# Altium PCB Route_Guide_and_Tuning.PcbDoc (part 3 of 8)
Units mil, origin at the board's own origin, x right, y up, seen from the top; angles counter-clockwise.
Board outline 3600 x 2300 mil, 14 copper layers (L1 TOP, L2_G, L3 SIG, L4_G, L4 SIG, L6_P, L7_G, L10_P, L11_P, L7 SIG, L13_P, L8 SIG, L15_G, L10 BOT), stack 89.291 mil thick; 4 components, 1934 nets, 2174 pads, 2165 vias.
Unrouted connection lines stored in the file: 123.
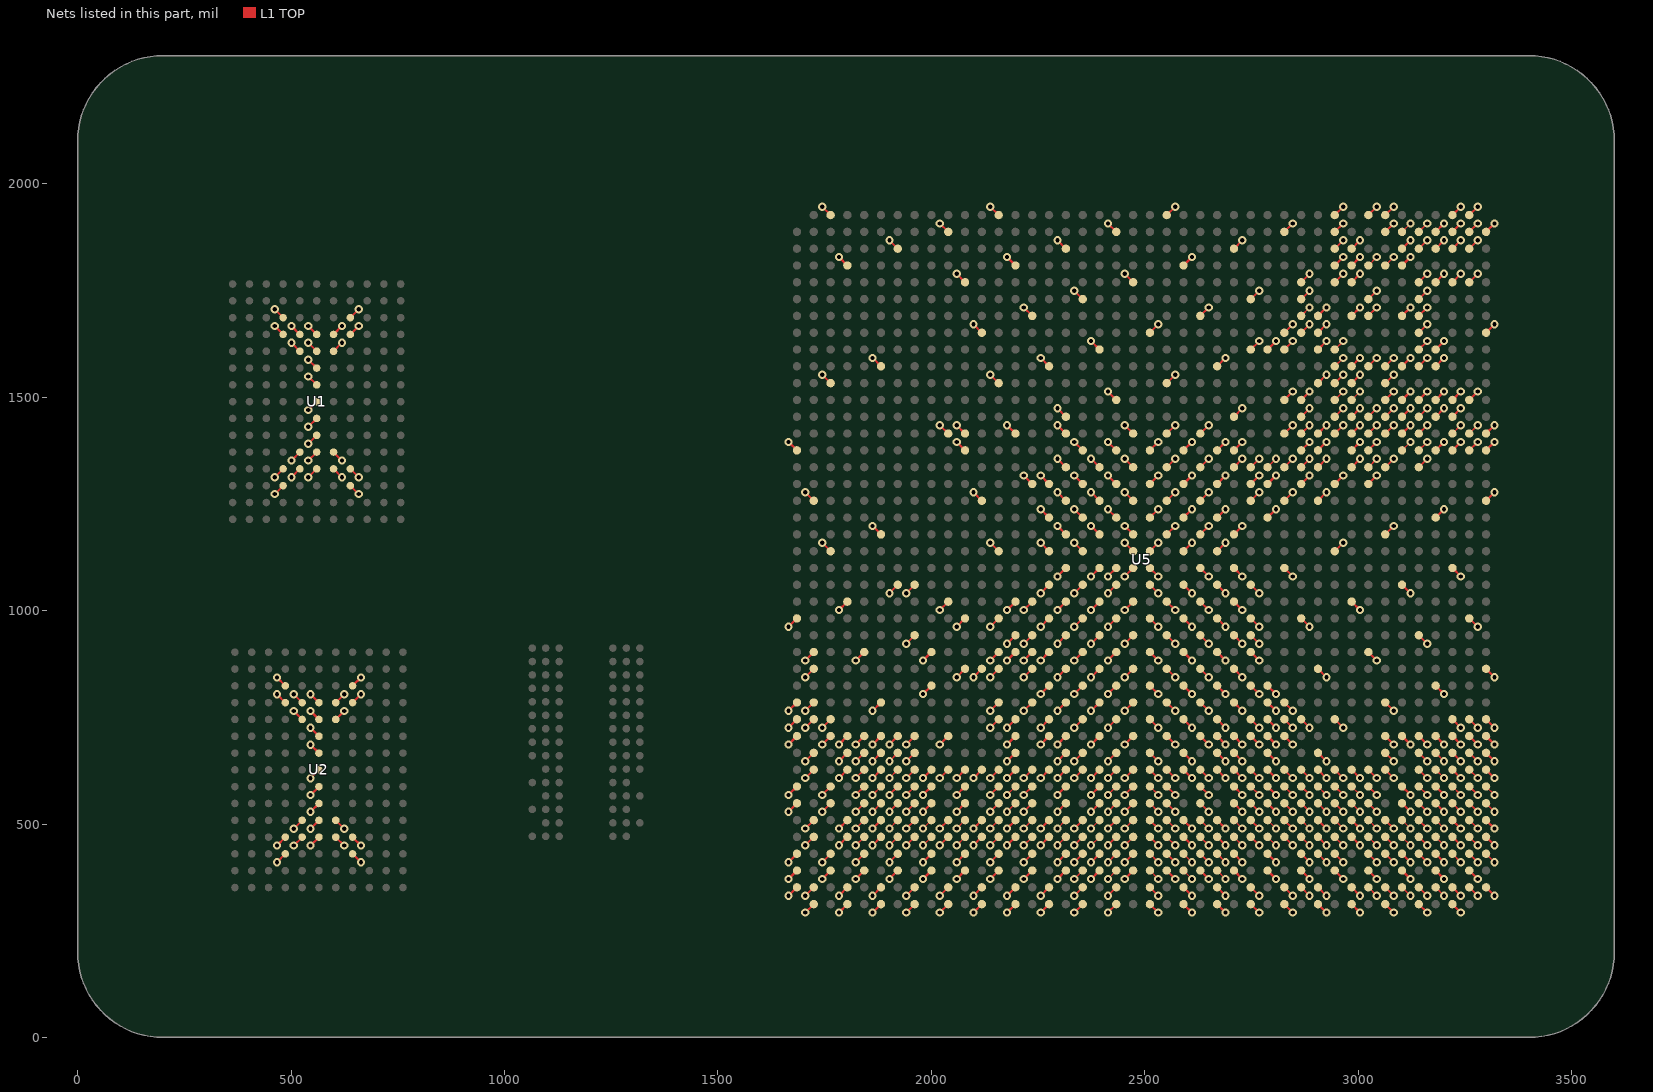
[diagram p15: the nets of this part, all layers, seen from the top]

## Via types
v1: diameter 19.4, hole 10, L1 TOP to L10 BOT, 2087 vias
v2: diameter 18.6, hole 10, L1 TOP to L10 BOT, tented both sides, 78 vias

## Nets (pads, with @x,y where several pads share a name; then routed paths per layer and width w, separated by ;. In a path a pad name is that pad's centre, name@x,y a point inside that pad or via, vN(x,y) a via of type N, cw(c..) or ccw(c..) an arc to the next point about the centre after c; other vN are vias at no path point) (continued)
DDR3.CKE0: U5.AV34 | length 27.8
  L1 TOP w5: U5.AV34@3141.85,1611.5 v1(3161.54,1631.18)
DDR3.CKE1: U5.AV35 | length 27.8
  L1 TOP w5: U5.AV35@3141.85,1650.87 v1(3161.54,1670.55)
DDR3.DM0: 
DDR3.DM1: 
DDR3.DM2: 
DDR3.DM3: 
DDR3.DM4: 
DDR3.DM5: 
DDR3.DM6: 
DDR3.DM7: 
DDR3.DM8: 
DDR3.DQ0: U5.AH25 | length 27.8
  L1 TOP w5: U5.AH25@2748.15,1257.17 v1(2767.84,1276.85)
DDR3.DQ1: U5.AM29 | length 27.8
  L1 TOP w5: U5.AM29@2905.63,1414.65 v1(2925.32,1434.33)
DDR3.DQ2: U5.AM28 | length 27.8
  L1 TOP w5: U5.AM28@2905.63,1375.28 v1(2925.32,1394.96)
DDR3.DQ3: U5.AN29 | length 27.8
  L1 TOP w5: U5.AN29@2945,1414.65 v1(2964.69,1434.33)
DDR3.DQ4: U5.AG27 | length 27.8
  L1 TOP w5: U5.AG27@2708.78,1335.91 v1(2728.47,1355.59)
DDR3.DQ5: U5.AH26 | length 27.8
  L1 TOP w5: U5.AH26@2748.15,1296.54 v1(2767.84,1316.22)
DDR3.DQ6: U5.AL27 | length 27.8
  L1 TOP w5: U5.AL27@2866.26,1335.91 v1(2885.95,1355.59)
DDR3.DQ7: U5.AK25 | length 27.8
  L1 TOP w5: U5.AK25@2826.89,1257.17 v1(2846.58,1276.85)
DDR3.DQ8: U5.AP28 | length 27.8
  L1 TOP w5: U5.AP28@2984.37,1375.28 v1(3004.06,1394.96)
DDR3.DQ9: U5.AY30 | length 27.8
  L1 TOP w5: U5.AY30@3220.59,1454.02 v1(3240.28,1473.7)
DDR3.DQ10: U5.AR29 | length 27.8
  L1 TOP w5: U5.AR29@3023.74,1414.65 v1(3043.43,1434.33)
DDR3.DQ11: U5.AR30 | length 27.8
  L1 TOP w5: U5.AR30@3023.74,1454.02 v1(3043.43,1473.7)
DDR3.DQ12: U5.AM27 | length 27.8
  L1 TOP w5: U5.AM27@2905.63,1335.91 v1(2925.32,1355.59)
DDR3.DQ13: U5.AN26 | length 27.8
  L1 TOP w5: U5.AN26@2945,1296.54 v1(2964.69,1316.22)
DDR3.DQ14: U5.AW28 | length 27.8
  L1 TOP w5: U5.AW28@3181.22,1375.28 v1(3200.91,1394.96)
DDR3.DQ15: U5.AV29 | length 27.8
  L1 TOP w5: U5.AV29@3141.85,1414.65 v1(3161.54,1434.33)
DDR3.DQ16: U5.AY28 | length 27.8
  L1 TOP w5: U5.AY28@3220.59,1375.28 v1(3240.28,1394.96)
DDR3.DQ17: U5.AU29 | length 27.8
  L1 TOP w5: U5.AU29@3102.48,1414.65 v1(3122.17,1434.33)
DDR3.DQ18: U5.AW31 | length 27.8
  L1 TOP w5: U5.AW31@3181.22,1493.39 v1(3200.91,1513.07)
DDR3.DQ19: U5.AU31 | length 27.8
  L1 TOP w5: U5.AU31@3102.48,1493.39 v1(3122.17,1513.07)
DDR3.DQ20: U5.AL26 | length 27.8
  L1 TOP w5: U5.AL26@2866.26,1296.54 v1(2885.95,1316.22)
DDR3.DQ21: U5.BB28 | length 27.8
  L1 TOP w5: U5.BB28@3299.33,1375.28 v1(3319.02,1394.96)
DDR3.DQ22: U5.AV30 | length 27.8
  L1 TOP w5: U5.AV30@3141.85,1454.02 v1(3161.54,1473.7)
DDR3.DQ23: U5.AT30 | length 27.8
  L1 TOP w5: U5.AT30@3063.11,1454.02 v1(3082.8,1473.7)
DDR3.DQ24: U5.AT29 | length 27.8
  L1 TOP w5: U5.AT29@3063.11,1414.65 v1(3082.8,1434.33)
DDR3.DQ25: U5.AW30 | length 27.8
  L1 TOP w5: U5.AW30@3181.22,1454.02 v1(3200.91,1473.7)
DDR3.DQ26: U5.BA31 | length 27.8
  L1 TOP w5: U5.BA31@3259.96,1493.39 v1(3279.65,1513.07)
DDR3.DQ27: U5.AV31 | length 27.8
  L1 TOP w5: U5.AV31@3141.85,1493.39 v1(3161.54,1513.07)
DDR3.DQ28: U5.AP27 | length 27.8
  L1 TOP w5: U5.AP27@2984.37,1335.91 v1(3004.06,1355.59)
DDR3.DQ29: U5.AR28 | length 27.8
  L1 TOP w5: U5.AR28@3023.74,1375.28 v1(3043.43,1394.96)
DDR3.DQ30: U5.BB29 | length 27.8
  L1 TOP w5: U5.BB29@3299.33,1414.65 v1(3319.02,1434.33)
DDR3.DQ31: U5.AT31 | length 27.8
  L1 TOP w5: U5.AT31@3063.11,1493.39 v1(3082.8,1513.07)
DDR3.DQ32: U5.AU33 | length 27.8
  L1 TOP w5: U5.AU33@3102.48,1572.13 v1(3122.17,1591.81)
DDR3.DQ33: U5.AV33 | length 27.8
  L1 TOP w5: U5.AV33@3141.85,1572.13 v1(3161.54,1591.81)
DDR3.DQ34: U5.AP33 | length 27.8
  L1 TOP w5: U5.AP33@2984.37,1572.13 v1(3004.06,1591.81)
DDR3.DQ35: U5.AM32 | length 27.8
  L1 TOP w5: U5.AM32@2905.63,1532.76 v1(2925.32,1552.44)
DDR3.DQ36: U5.AT32 | length 27.8
  L1 TOP w5: U5.AT32@3063.11,1532.76 v1(3082.8,1552.44)
DDR3.DQ37: U5.AW33 | length 27.8
  L1 TOP w5: U5.AW33@3181.22,1572.13 v1(3200.91,1591.81)
DDR3.DQ38: U5.AR33 | length 27.8
  L1 TOP w5: U5.AR33@3023.74,1572.13 v1(3043.43,1591.81)
DDR3.DQ39: U5.AP32 | length 27.8
  L1 TOP w5: U5.AP32@2984.37,1532.76 v1(3004.06,1552.44)
DDR3.DQ40: U5.BA40 | length 27.8
  L1 TOP w5: U5.BA40@3259.96,1847.72 v1(3279.65,1867.4)
DDR3.DQ41: U5.BA41 | length 27.8
  L1 TOP w5: U5.BA41@3259.96,1887.09 v1(3279.65,1906.77)
DDR3.DQ42: U5.AK34 | length 27.8
  L1 TOP w5: U5.AK34@2826.89,1611.5 v1(2846.58,1631.18)
DDR3.DQ43: U5.AP38 | length 27.8
  L1 TOP w5: U5.AP38@2984.37,1768.98 v1(3004.06,1788.66)
DDR3.DQ44: U5.AM34 | length 27.8
  L1 TOP w5: U5.AM34@2905.63,1611.5 v1(2925.32,1631.18)
DDR3.DQ45: U5.AL35 | length 27.8
  L1 TOP w5: U5.AL35@2866.26,1650.87 v1(2885.95,1670.55)
DDR3.DQ46: U5.AM36 | length 27.8
  L1 TOP w5: U5.AM36@2905.63,1690.24 v1(2925.32,1709.92)
DDR3.DQ47: U5.AY40 | length 27.8
  L1 TOP w5: U5.AY40@3220.59,1847.72 v1(3240.28,1867.4)
DDR3.DQ48: U5.BA42 | length 27.8
  L1 TOP w5: U5.BA42@3259.96,1926.46 v1(3279.65,1946.14)
DDR3.DQ49: U5.AW41 | length 27.8
  L1 TOP w5: U5.AW41@3181.22,1887.09 v1(3200.91,1906.77)
DDR3.DQ50: U5.AU39 | length 27.8
  L1 TOP w5: U5.AU39@3102.48,1808.35 v1(3122.17,1828.03)
DDR3.DQ51: U5.AL37 | length 27.8
  L1 TOP w5: U5.AL37@2866.26,1729.61 v1(2885.95,1749.29)
DDR3.DQ52: U5.AW40 | length 27.8
  L1 TOP w5: U5.AW40@3181.22,1847.72 v1(3200.91,1867.4)
DDR3.DQ53: U5.AV40 | length 27.8
  L1 TOP w5: U5.AV40@3141.85,1847.72 v1(3161.54,1867.4)
DDR3.DQ54: U5.BB41 | length 27.8
  L1 TOP w5: U5.BB41@3299.33,1887.09 v1(3319.02,1906.77)
DDR3.DQ55: U5.AN38 | length 27.8
  L1 TOP w5: U5.AN38@2945,1768.98 v1(2964.69,1788.66)
DDR3.DQ56: U5.AY42 | length 27.8
  L1 TOP w5: U5.AY42@3220.59,1926.46 v1(3240.28,1946.14)
DDR3.DQ57: U5.AP40 | length 27.8
  L1 TOP w5: U5.AP40@2984.37,1847.72 v1(3004.06,1867.4)
DDR3.DQ58: U5.AR42 | length 27.8
  L1 TOP w5: U5.AR42@3023.74,1926.46 v1(3043.43,1946.14)
DDR3.DQ59: U5.AN41 | length 27.8
  L1 TOP w5: U5.AN41@2945,1887.09 v1(2964.69,1906.77)
DDR3.DQ60: U5.AN40 | length 27.8
  L1 TOP w5: U5.AN40@2945,1847.72 v1(2964.69,1867.4)
DDR3.DQ61: U5.AN39 | length 27.8
  L1 TOP w5: U5.AN39@2945,1808.35 v1(2964.69,1828.03)
DDR3.DQ62: U5.AT41 | length 27.8
  L1 TOP w5: U5.AT41@3063.11,1887.09 v1(3082.8,1906.77)
DDR3.DQ63: U5.AT42 | length 27.8
  L1 TOP w5: U5.AT42@3063.11,1926.46 v1(3082.8,1946.14)
DDR3.DQ64: U5.AL29 | length 27.8
  L1 TOP w5: U5.AL29@2866.26,1414.65 v1(2885.95,1434.33)
DDR3.DQ65: U5.AN30 | length 27.8
  L1 TOP w5: U5.AN30@2945,1454.02 v1(2964.69,1473.7)
DDR3.DQ66: U5.AL31 | length 27.8
  L1 TOP w5: U5.AL31@2866.26,1493.39 v1(2885.95,1513.07)
DDR3.DQ67: U5.AG28 | length 27.8
  L1 TOP w5: U5.AG28@2708.78,1375.28 v1(2728.47,1394.96)
DDR3.DQ68: U5.AJ26 | length 27.8
  L1 TOP w5: U5.AJ26@2787.52,1296.54 v1(2807.21,1316.22)
DDR3.DQ69: U5.AK29 | length 27.8
  L1 TOP w5: U5.AK29@2826.89,1414.65 v1(2846.58,1434.33)
DDR3.DQ70: U5.AL30 | length 27.8
  L1 TOP w5: U5.AL30@2866.26,1454.02 v1(2885.95,1473.7)
DDR3.DQ71: U5.AP30 | length 27.8
  L1 TOP w5: U5.AP30@2984.37,1454.02 v1(3004.06,1473.7)
DDR3.DQS_N0: U5.AJ27 | length 27.8
  L1 TOP w3.8: U5.AJ27@2787.52,1335.91 v1(2807.21,1355.59)
DDR3.DQS_N1: U5.AV28 | length 27.8
  L1 TOP w3.8: U5.AV28@3141.85,1375.28 v1(3161.54,1394.96)
DDR3.DQS_N2: U5.AT27 | length 27.8
  L1 TOP w3.8: U5.AT27@3063.11,1335.91 v1(3082.8,1355.59)
DDR3.DQS_N3: U5.BA29 | length 27.8
  L1 TOP w3.8: U5.BA29@3259.96,1414.65 v1(3279.65,1434.33)
DDR3.DQS_N4: U5.AN34 | length 27.8
  L1 TOP w3.8: U5.AN34@2945,1611.5 v1(2964.69,1631.18)
DDR3.DQS_N5: U5.AL36 | length 27.8
  L1 TOP w3.8: U5.AL36@2866.26,1690.24 v1(2885.95,1709.92)
DDR3.DQS_N6: U5.AT39 | length 27.8
  L1 TOP w3.8: U5.AT39@3063.11,1808.35 v1(3082.8,1828.03)
DDR3.DQS_N7: U5.AU41 | length 27.8
  L1 TOP w3.8: U5.AU41@3102.48,1887.09 v1(3122.17,1906.77)
DDR3.DQS_N8: U5.AN31 | length 27.8
  L1 TOP w3.8: U5.AN31@2945,1493.39 v1(2964.69,1513.07)
DDR3.DQS_P0: U5.AK27 | length 27.8
  L1 TOP w3.8: U5.AK27@2826.89,1335.91 v1(2846.58,1355.59)
DDR3.DQS_P1: U5.AU28 | length 27.8
  L1 TOP w3.8: U5.AU28@3102.48,1375.28 v1(3122.17,1394.96)
DDR3.DQS_P2: U5.AR27 | length 27.8
  L1 TOP w3.8: U5.AR27@3023.74,1335.91 v1(3043.43,1355.59)
DDR3.DQS_P3: U5.AY29 | length 27.8
  L1 TOP w3.8: U5.AY29@3220.59,1414.65 v1(3240.28,1434.33)
DDR3.DQS_P4: U5.AN33 | length 27.8
  L1 TOP w3.8: U5.AN33@2945,1572.13 v1(2964.69,1591.81)
DDR3.DQS_P5: U5.AK35 | length 27.8
  L1 TOP w3.8: U5.AK35@2826.89,1650.87 v1(2846.58,1670.55)
DDR3.DQS_P6: U5.AR39 | length 27.8
  L1 TOP w3.8: U5.AR39@3023.74,1808.35 v1(3043.43,1828.03)
DDR3.DQS_P7: U5.AV41 | length 27.8
  L1 TOP w3.8: U5.AV41@3141.85,1887.09 v1(3161.54,1906.77)
DDR3.DQS_P8: U5.AP31 | length 27.8
  L1 TOP w3.8: U5.AP31@2984.37,1493.39 v1(3004.06,1513.07)
DDR3.ODT0: U5.AU36 | length 27.8
  L1 TOP w5: U5.AU36@3102.48,1690.24 v1(3122.17,1709.92)
DDR3.ODT1: U5.AV36 | length 27.8
  L1 TOP w5: U5.AV36@3141.85,1690.24 v1(3161.54,1709.92)
DDR3.RASN: U5.AY38 | length 27.8
  L1 TOP w5: U5.AY38@3220.59,1768.98 v1(3240.28,1788.66)
DDR3.RESETN: U5.N13 | length 27.8
  L1 TOP w5: v1(2137.91,765.04) U5.N13@2157.6,784.72
DDR3.SN0: U5.AW38 | length 27.8
  L1 TOP w5: U5.AW38@3181.22,1768.98 v1(3200.91,1788.66)
DDR3.SN1: U5.AR37 | length 27.8
  L1 TOP w5: U5.AR37@3023.74,1729.61 v1(3043.43,1749.29)
DDR3.SN2: U5.AP36 | length 27.8
  L1 TOP w5: U5.AP36@2984.37,1690.24 v1(3004.06,1709.92)
DDR3.SN3: U5.AH34 | length 27.8
  L1 TOP w5: U5.AH34@2748.15,1611.5 v1(2767.84,1631.18)
DDR3.WEN: U5.AV38 | length 27.8
  L1 TOP w5: U5.AV38@3141.85,1768.98 v1(3161.54,1788.66)
DDR3_VREF: 
DDR3_VTT: 
DONE_LEDN: 
EPB.DOEN: 
EPB.PADDR5: 
EPB.PADDR6: 
EPB.PADDR7: 
EPB.PADDR8: 
EPB.PADDR9: 
EPB.PADDR10: 
EPB.PADDR11: 
EPB.PADDR12: 
EPB.PADDR13: 
EPB.PADDR14: 
EPB.PADDR15: 
EPB.PADDR16: 
EPB.PADDR17: 
EPB.PADDR18: 
EPB.PADDR19: 
EPB.PADDR20: 
EPB.PADDR21: 
EPB.PADDR22: 
EPB.PADDR23: 
EPB.PADDR24: 
EPB.PADDR25: 
EPB.PADDR26: 
EPB.PADDR27: 
EPB.PADDR28: 
EPB.PADDR29: 
EPB.PADDR30: 
EPB.PADDR31: 
EPB.PBEN0: 
EPB.PBEN1: 
EPB.PBEN2: 
EPB.PBEN3: 
EPB.PBLASTN: 
EPB.PCSN_CPLD: 
EPB.PCSN_FLASH: 
EPB.PCSN_FPGA0: 
EPB.PCSN_FPGA1: 
EPB.PCSN_SMAP: 
EPB.PDATA0: 
EPB.PDATA1: 
EPB.PDATA2: 
EPB.PDATA3: 
EPB.PDATA4: 
EPB.PDATA5: 
EPB.PDATA6: 
EPB.PDATA7: 
EPB.PDATA8: 
EPB.PDATA9: 
EPB.PDATA10: 
EPB.PDATA11: 
EPB.PDATA12: 
EPB.PDATA13: 
EPB.PDATA14: 
EPB.PDATA15: 
EPB.PDATA16: 
EPB.PDATA17: 
EPB.PDATA18: 
EPB.PDATA19: 
EPB.PDATA20: 
EPB.PDATA21: 
EPB.PDATA22: 
EPB.PDATA23: 
EPB.PDATA24: 
EPB.PDATA25: 
EPB.PDATA26: 
EPB.PDATA27: 
EPB.PDATA28: 
EPB.PDATA29: 
EPB.PDATA30: 
EPB.PDATA31: 
EPB.PERCLK: 
EPB.POEN: 
EPB.PRDY: 
EPB.PWRN: 
EXT_REFCLK_N0: U5.G9 | length 27.8
  L1 TOP w3.8: v1(1901.69,607.56) U5.G9@1921.38,627.24
EXT_REFCLK_N1: U5.AB7 | length 27.8
  L1 TOP w3.8: U5.AB7@2511.93,548.5 v1(2531.62,528.82)
EXT_REFCLK_N2: U5.AK7 | length 27.8
  L1 TOP w3.8: U5.AK7@2826.89,548.5 v1(2846.58,528.82)
EXT_REFCLK_N3: U5.BA9 | length 27.8
  L1 TOP w3.8: U5.BA9@3259.96,627.24 v1(3279.65,607.56)
EXT_REFCLK_N4: U5.E9 | length 27.8
  L1 TOP w3.8: v1(1822.95,607.56) U5.E9@1842.64,627.24
EXT_REFCLK_N5: U5.Y7 | length 27.8
  L1 TOP w3.8: v1(2413.5,528.82) U5.Y7@2433.19,548.5
EXT_REFCLK_N6: U5.AH7 | length 27.8
  L1 TOP w3.8: U5.AH7@2748.15,548.5 v1(2767.84,528.82)
EXT_REFCLK_N7: U5.AW9 | length 27.8
  L1 TOP w3.8: U5.AW9@3181.22,627.24 v1(3200.91,607.56)
EXT_REFCLK_P0: U5.G10 | length 27.8
  L1 TOP w3.8: v1(1901.69,646.93) U5.G10@1921.38,666.61
EXT_REFCLK_P1: U5.AB8 | length 27.8
  L1 TOP w3.8: U5.AB8@2511.93,587.87 v1(2531.62,568.19)
EXT_REFCLK_P2: U5.AK8 | length 27.8
  L1 TOP w3.8: U5.AK8@2826.89,587.87 v1(2846.58,568.19)
EXT_REFCLK_P3: U5.BA10 | length 27.8
  L1 TOP w3.8: U5.BA10@3259.96,666.61 v1(3279.65,646.93)
EXT_REFCLK_P4: U5.E10 | length 27.8
  L1 TOP w3.8: v1(1822.95,646.93) U5.E10@1842.64,666.61
EXT_REFCLK_P5: U5.Y8 | length 27.8
  L1 TOP w3.8: v1(2413.5,568.19) U5.Y8@2433.19,587.87
EXT_REFCLK_P6: U5.AH8 | length 27.8
  L1 TOP w3.8: U5.AH8@2748.15,587.87 v1(2767.84,568.19)
EXT_REFCLK_P7: U5.AW10 | length 27.8
  L1 TOP w3.8: U5.AW10@3181.22,666.61 v1(3200.91,646.93)
FAN_ALERTN: 
FAULT_LEDN: 
FAULTN: 
FLASH_BUSYN: 
FTDI_CTRL0: 
FTDI_CTRL1: 
FTDI_CTRL2: 
FTDI_CTRL3: 
FTDI_TCK: 
FTDI_TDI: 
FTDI_TDO: 
FTDI_TMS: 
FTDI_TRSTN: 
FTDI_USBD_N: 
FTDI_USBD_P: 
GETH_IRQN: 
GND: U1.C4 U1.C8 U1.D4 U1.D5 U1.D6 U1.D7 U1.D8 U1.E5 U1.E6 U1.E7 U1.F6 U1.G6 U1.H6 U1.J6 U1.K6 U1.L5 U1.L6 U1.L7 U1.M4 U1.M5 U1.M6 U1.M7 U1.M8 U1.N4 U1.N8 U2.C4 U2.C8 U2.D4 U2.D5 U2.D6 U2.D7 U2.D8 U2.E5 U2.E6 U2.E7 U2.F6 U2.G6 U2.H6 U2.J6 U2.K6 U2.L5 U2.L6 U2.L7 U2.M4 U2.M5 U2.M6 U2.M7 U2.M8 U2.N4 U2.N8 U5.A2 U5.A3 U5.A4 U5.A7 U5.A8 U5.A11 U5.A13 U5.A18 U5.A28 U5.AA3 U5.AA7 U5.AA9 U5.AA11 U5.AA13 U5.AA15 U5.AA17 U5.AA19 U5.AA21 U5.AA22 U5.AA23 U5.AA25 U5.AA27 U5.AA29 U5.AA38 U5.AB1 U5.AB2 U5.AB5 U5.AB6 U5.AB9 U5.AB10 U5.AB12 U5.AB14 U5.AB16 U5.AB18 U5.AB20 U5.AB21 U5.AB22 U5.AB24 U5.AB26 U5.AB28 U5.AB35 U5.AC3 U5.AC7 U5.AC9 U5.AC11 U5.AC13 U5.AC15 U5.AC17 U5.AC19 U5.AC23 U5.AC25 U5.AC27 U5.AC29 U5.AC32 U5.AC42 U5.AD1 U5.AD2 U5.AD5 U5.AD6 U5.AD9 U5.AD10 U5.AD12 U5.AD14 U5.AD16 U5.AD18 U5.AD20 U5.AD22 U5.AD24 U5.AD26 U5.AD28 U5.AD39 U5.AE3 U5.AE7 U5.AE9 U5.AE11 U5.AE13 U5.AE15 U5.AE17 U5.AE19 U5.AE21 U5.AE23 U5.AE25 U5.AE27 U5.AE29 U5.AE36 U5.AF1 U5.AF2 U5.AF5 U5.AF6 U5.AF9 U5.AF10 U5.AF11 U5.AF12 U5.AF14 U5.AF16 U5.AF18 U5.AF20 U5.AF22 U5.AF24 U5.AF26 U5.AF28 U5.AF33 U5.AG3 U5.AG4 U5.AG7 U5.AG8 U5.AG9 U5.AG10 U5.AG11 U5.AG13 U5.AG15 U5.AG17 U5.AG19 U5.AG21 U5.AG23 U5.AG30 U5.AG40 U5.AH1 U5.AH2 U5.AH5 U5.AH6 U5.AH9 U5.AH11 U5.AH12 U5.AH14 U5.AH16 U5.AH17 U5.AH18 U5.AH20 U5.AH27 U5.AH37 U5.AJ3 U5.AJ7 U5.AJ9 U5.AJ10 U5.AJ11 U5.AJ12 U5.AJ13 U5.AJ14 U5.AJ24 U5.AJ34 U5.AK1 U5.AK2 U5.AK5 U5.AK6 U5.AK9 U5.AK11 U5.AK12 U5.AK13 U5.AK21 U5.AK31 U5.AK41 U5.AL3 U5.AL7 U5.AL9 U5.AL12 U5.AL18 U5.AL28 U5.AL38 U5.AM1 U5.AM2 U5.AM5 U5.AM9 U5.AM10 U5.AM15 U5.AM25 U5.AM35 U5.AN3 U5.AN7 U5.AN9 U5.AN12 U5.AN22 U5.AN32 U5.AN42 U5.AP1 U5.AP2 U5.AP5 U5.AP9 U5.AP19 U5.AP29 U5.AP39 U5.AR3 U5.AR7 U5.AR9 U5.AR16 U5.AR26 U5.AR36 U5.AT1 U5.AT2 U5.AT5 U5.AT6 U5.AT9 U5.AT10 U5.AT11 U5.AT13 U5.AT23 U5.AT33 U5.AU3 U5.AU7 U5.AU11 U5.AU20 U5.AU30 U5.AU40 U5.AV1 U5.AV2 U5.AV5 U5.AV9 U5.AV10 U5.AV11 U5.AV17 U5.AV27 U5.AV37 U5.AW3 U5.AW7 U5.AW11 U5.AW14 U5.AW24 U5.AW34 U5.AY1 U5.AY2 U5.AY5 U5.AY9 U5.AY10 U5.AY11 U5.AY12 U5.AY21 U5.AY31 U5.AY41 U5.B1 U5.B2 U5.B5 U5.B9 U5.B10 U5.B12 U5.B13 U5.B15 U5.B25 U5.BA3 U5.BA7 U5.BA11 U5.BA12 U5.BA18 U5.BA28 U5.BA38 U5.BB2 U5.BB5 U5.BB6 U5.BB9 U5.BB10 U5.BB11 U5.BB12 U5.BB15 U5.BB25 U5.BB35 U5.C3 U5.C7 U5.C11 U5.C12 U5.C22 U5.C32 U5.C42 U5.D1 U5.D2 U5.D5 U5.D9 U5.D10 U5.D11 U5.D19 U5.D39 U5.E3 U5.E7 U5.E11 U5.E16 U5.F1 U5.F2 U5.F5 U5.F9 U5.F10 U5.F11 U5.F13 U5.F23 U5.F33 U5.G3 U5.G7 U5.G11 U5.G20 U5.G40 U5.H1 U5.H2 U5.H5 U5.H9 U5.H10 U5.H11 U5.H17 U5.J3 U5.J7 U5.J9 U5.J14 U5.K1 U5.K2 U5.K5 U5.K6 U5.K9 U5.K11 U5.K41 U5.L3 U5.L7 U5.L9 U5.L18 U5.L28 U5.L38 U5.M1 U5.M2 U5.M5 U5.M6 U5.M9 U5.M15 U5.M25 U5.M35 U5.N3 U5.N7 U5.N9 U5.N12 U5.N22 U5.N32 U5.N42 U5.P1 U5.P2 U5.P5 U5.P9 U5.P11 U5.P12 U5.P19 U5.P29 U5.P39 U5.R3 U5.R7 U5.R9 U5.R13 U5.R15 U5.R16 U5.R17 U5.R19 U5.R26 U5.R36 U5.T1 U5.T2 U5.T5 U5.T6 U5.T9 U5.T11 U5.T12 U5.T14 U5.T16 U5.T18 U5.T20 U5.T22 U5.T24 U5.T26 U5.T33 U5.U3 U5.U4 U5.U7 U5.U8 U5.U9 U5.U10 U5.U11 U5.U13 U5.U15 U5.U17 U5.U19 U5.U21 U5.U23 U5.U25 U5.U27 U5.U29 U5.U30 U5.U40 U5.V1 U5.V2 U5.V5 U5.V6 U5.V9 U5.V10 U5.V12 U5.V14 U5.V16 U5.V18 U5.V20 U5.V22 U5.V24 U5.V26 U5.V28 U5.V37 U5.W3 U5.W7 U5.W9 U5.W11 U5.W13 U5.W15 U5.W17 U5.W19 U5.W21 U5.W23 U5.W25 U5.W27 U5.W34 U5.Y1 U5.Y2 U5.Y5 U5.Y6 U5.Y9 U5.Y10 U5.Y12 U5.Y14 U5.Y16 U5.Y18 U5.Y20 U5.Y21 U5.Y24 U5.Y26 U5.Y28 U5.Y31 U5.Y41 | length 13196.3
  L1 TOP w5: v1(461.69,1272.79) U1.C8@481.38,1292.48 ; v1(461.69,1312.16) U1.D8@481.38,1331.85 ; v1(461.69,1666.5) U1.M8@481.38,1646.81 ; v1(461.69,1705.87) U1.N8@481.38,1686.18 ; v1(466.97,410.27) U2.C8@486.65,429.96 ; v1(466.97,449.64) U2.D8@486.65,469.33 ; v1(466.97,803.98) U2.M8@486.65,784.29 ; v1(466.97,843.35) U2.N8@486.65,823.66 ; v1(501.06,1312.16) U1.D7@520.75,1331.85 ; v1(501.06,1351.53) U1.E7@520.75,1371.22 ; v1(501.06,1627.13) U1.L7@520.75,1607.44 ; v1(501.06,1666.5) U1.M7@520.75,1646.81 ; v1(506.34,449.64) U2.D7@526.02,469.33 ; v1(506.34,489.01) U2.E7@526.02,508.7 ; v1(506.34,764.61) U2.L7@526.02,744.92 ; v1(506.34,803.98) U2.M7@526.02,784.29 ; v1(540.43,1312.16) U1.D6@560.12,1331.85 ; v1(540.43,1351.53) U1.E6@560.12,1371.22 ; v1(540.43,1390.9) U1.F6@560.12,1410.59 ; v1(540.43,1430.27) U1.G6@560.12,1449.96 ; v1(540.43,1469.64) U1.H6@560.12,1489.33 ; v1(540.43,1548.39) U1.J6@560.12,1528.7 ; v1(540.43,1587.76) U1.K6@560.12,1568.07 ; v1(540.43,1627.13) U1.L6@560.12,1607.44 ; v1(540.43,1666.5) U1.M6@560.12,1646.81 ; v1(545.71,449.64) U2.D6@565.39,469.33 ; v1(545.71,489.01) U2.E6@565.39,508.7 ; v1(545.71,528.38) U2.F6@565.39,548.07 ; v1(545.71,567.75) U2.G6@565.39,587.44 ; v1(545.71,607.12) U2.H6@565.39,626.81 ; v1(545.71,685.87) U2.J6@565.39,666.18 ; v1(545.71,725.24) U2.K6@565.39,705.55 ; v1(545.71,764.61) U2.L6@565.39,744.92 ; v1(545.71,803.98) U2.M6@565.39,784.29 ; U1.D5@599.49,1331.85 v1(619.17,1312.16) ; U1.E5@599.49,1371.22 v1(619.17,1351.53) ; U1.L5@599.49,1607.44 v1(619.17,1627.13) ; U1.M5@599.49,1646.81 v1(619.17,1666.5) ; U2.D5@604.76,469.33 v1(624.45,449.64) ; U2.E5@604.76,508.7 v1(624.45,489.01) ; U2.L5@604.76,744.92 v1(624.45,764.61) ; U2.M5@604.76,784.29 v1(624.45,803.98) ; U1.C4@638.86,1292.48 v1(658.54,1272.79) ; U1.D4@638.86,1331.85 v1(658.54,1312.16) ; U1.M4@638.86,1646.81 v1(658.54,1666.5) ; U1.N4@638.86,1686.18 v1(658.54,1705.87) ; U2.C4@644.14,429.96 v1(663.82,410.27) ; U2.D4@644.14,469.33 v1(663.82,449.64) ; U2.M4@644.14,784.29 v1(663.82,803.98) ; U2.N4@644.14,823.66 v1(663.82,843.35) ; v1(1665.47,331.97) U5.A2@1685.16,351.65 ; v1(1665.47,371.34) U5.A3@1685.16,391.02 ; v1(1665.47,410.71) U5.A4@1685.16,430.39 ; v1(1665.47,528.82) U5.A7@1685.16,548.5 ; v1(1665.47,568.19) U5.A8@1685.16,587.87 ; v1(1665.47,686.3) U5.A11@1685.16,705.98 ; v1(1665.47,765.04) U5.A13@1685.16,784.72 ; v1(1665.47,961.89) U5.A18@1685.16,981.57 ; v1(1665.47,1394.96) U5.A28@1685.16,1375.28 ; v1(1704.84,292.6) U5.B1@1724.53,312.28 ; v1(1704.84,331.97) U5.B2@1724.53,351.65 ; v1(1704.84,450.08) U5.B5@1724.53,469.76 ; v1(1704.84,607.56) U5.B9@1724.53,627.24 ; v1(1704.84,646.93) U5.B10@1724.53,666.61 ; v1(1704.84,725.67) U5.B12@1724.53,745.35 ; v1(1704.84,765.04) U5.B13@1724.53,784.72 ; v1(1704.84,843.78) U5.B15@1724.53,863.46 ; v1(1704.84,1276.85) U5.B25@1724.53,1257.17 ; v1(1744.21,371.34) U5.C3@1763.9,391.02 ; v1(1744.21,528.82) U5.C7@1763.9,548.5 ; v1(1744.21,686.3) U5.C11@1763.9,705.98 ; v1(1744.21,725.67) U5.C12@1763.9,745.35 ; v1(1744.21,1158.74) U5.C22@1763.9,1139.06 ; v1(1744.21,1552.44) U5.C32@1763.9,1532.76 ; v1(1744.21,1946.14) U5.C42@1763.9,1926.46 ; v1(1783.58,292.6) U5.D1@1803.27,312.28 ; v1(1783.58,331.97) U5.D2@1803.27,351.65 ; v1(1783.58,450.08) U5.D5@1803.27,469.76 ; v1(1783.58,607.56) U5.D9@1803.27,627.24 ; v1(1783.58,646.93) U5.D10@1803.27,666.61 ; v1(1783.58,686.3) U5.D11@1803.27,705.98 ; v1(1783.58,1001.26) U5.D19@1803.27,1020.94 ; v1(1783.58,1828.03) U5.D39@1803.27,1808.35 ; v1(1822.95,371.34) U5.E3@1842.64,391.02 ; v1(1822.95,528.82) U5.E7@1842.64,548.5 ; v1(1822.95,686.3) U5.E11@1842.64,705.98 ; v1(1822.95,883.15) U5.E16@1842.64,902.83 ; v1(1862.32,292.6) U5.F1@1882.01,312.28 ; v1(1862.32,331.97) U5.F2@1882.01,351.65 ; v1(1862.32,450.08) U5.F5@1882.01,469.76 ; v1(1862.32,607.56) U5.F9@1882.01,627.24 ; v1(1862.32,646.93) U5.F10@1882.01,666.61 ; v1(1862.32,686.3) U5.F11@1882.01,705.98 ; v1(1862.32,765.04) U5.F13@1882.01,784.72 ; v1(1862.32,1198.11) U5.F23@1882.01,1178.43 ; v1(1862.32,1591.81) U5.F33@1882.01,1572.13 ; v1(1901.69,371.34) U5.G3@1921.38,391.02 ; v1(1901.69,528.82) U5.G7@1921.38,548.5 ; v1(1901.69,686.3) U5.G11@1921.38,705.98 ; v1(1901.69,1040.63) U5.G20@1921.38,1060.32 ; v1(1901.69,1867.4) U5.G40@1921.38,1847.72 ; v1(1941.06,292.6) U5.H1@1960.75,312.28 ; v1(1941.06,331.97) U5.H2@1960.75,351.65 ; v1(1941.06,450.08) U5.H5@1960.75,469.76 ; v1(1941.06,607.56) U5.H9@1960.75,627.24 ; v1(1941.06,646.93) U5.H10@1960.75,666.61 ; v1(1941.06,686.3) U5.H11@1960.75,705.98 ; v1(1941.06,922.52) U5.H17@1960.75,942.2 ; v1(1980.43,371.34) U5.J3@2000.12,391.02 ; v1(1980.43,528.82) U5.J7@2000.12,548.5 ; v1(1980.43,607.56) U5.J9@2000.12,627.24 ; v1(1980.43,804.41) U5.J14@2000.12,824.09 ; v1(2019.8,292.6) U5.K1@2039.49,312.28 ; v1(2019.8,331.97) U5.K2@2039.49,351.65 ; v1(2019.8,450.08) U5.K5@2039.49,469.76 ; v1(2019.8,489.45) U5.K6@2039.49,509.13 ; v1(2019.8,607.56) U5.K9@2039.49,627.24 ; v1(2019.8,686.3) U5.K11@2039.49,705.98 ; v1(2019.8,1906.77) U5.K41@2039.49,1887.09 ; v1(2059.17,371.34) U5.L3@2078.86,391.02 ; v1(2059.17,528.82) U5.L7@2078.86,548.5 ; v1(2059.17,607.56) U5.L9@2078.86,627.24 ; v1(2059.17,961.89) U5.L18@2078.86,981.57 ; v1(2059.17,1394.96) U5.L28@2078.86,1375.28 ; v1(2059.17,1788.66) U5.L38@2078.86,1768.98 ; v1(2098.54,292.6) U5.M1@2118.23,312.28 ; v1(2098.54,331.97) U5.M2@2118.23,351.65 ; v1(2098.54,450.08) U5.M5@2118.23,469.76 ; v1(2098.54,489.45) U5.M6@2118.23,509.13 ; v1(2098.54,607.56) U5.M9@2118.23,627.24 ; v1(2098.54,843.78) U5.M15@2118.23,863.46 ; v1(2098.54,1276.85) U5.M25@2118.23,1257.17 ; v1(2098.54,1670.55) U5.M35@2118.23,1650.87 ; v1(2137.91,371.34) U5.N3@2157.6,391.02 ; v1(2137.91,528.82) U5.N7@2157.6,548.5 ; v1(2137.91,607.56) U5.N9@2157.6,627.24 ; v1(2137.91,725.67) U5.N12@2157.6,745.35 ; v1(2137.91,1158.74) U5.N22@2157.6,1139.06 ; v1(2137.91,1552.44) U5.N32@2157.6,1532.76 ; v1(2137.91,1946.14) U5.N42@2157.6,1926.46 ; v1(2177.28,292.6) U5.P1@2196.97,312.28 ; v1(2177.28,331.97) U5.P2@2196.97,351.65 ; v1(2177.28,450.08) U5.P5@2196.97,469.76 ; v1(2177.28,607.56) U5.P9@2196.97,627.24 ; v1(2177.28,686.3) U5.P11@2196.97,705.98 ; v1(2177.28,725.67) U5.P12@2196.97,745.35 ; v1(2177.28,1001.26) U5.P19@2196.97,1020.94 ; v1(2177.28,1434.33) U5.P29@2196.97,1414.65 ; v1(2177.28,1828.03) U5.P39@2196.97,1808.35 ; v1(2216.65,371.34) U5.R3@2236.34,391.02 ; v1(2216.65,528.82) U5.R7@2236.34,548.5 ; v1(2216.65,607.56) U5.R9@2236.34,627.24 ; v1(2216.65,765.04) U5.R13@2236.34,784.72 ; v1(2216.65,843.78) U5.R15@2236.34,863.46 ; v1(2216.65,883.15) U5.R16@2236.34,902.83 ; v1(2216.65,922.52) U5.R17@2236.34,942.2 ; v1(2216.65,1001.26) U5.R19@2236.34,1020.94 ; v1(2216.65,1316.22) U5.R26@2236.34,1296.54 ; v1(2216.65,1709.92) U5.R36@2236.34,1690.24 ; v1(2256.02,292.6) U5.T1@2275.71,312.28 ; v1(2256.02,331.97) U5.T2@2275.71,351.65 ; v1(2256.02,450.08) U5.T5@2275.71,469.76 ; v1(2256.02,489.45) U5.T6@2275.71,509.13 ; v1(2256.02,607.56) U5.T9@2275.71,627.24 ; v1(2256.02,686.3) U5.T11@2275.71,705.98 ; v1(2256.02,725.67) U5.T12@2275.71,745.35 ; v1(2256.02,804.41) U5.T14@2275.71,824.09 ; v1(2256.02,883.15) U5.T16@2275.71,902.83 ; v1(2256.02,961.89) U5.T18@2275.71,981.57 ; v1(2256.02,1040.63) U5.T20@2275.71,1060.32 ; v1(2256.02,1158.74) U5.T22@2275.71,1139.06 ; v1(2256.02,1237.48) U5.T24@2275.71,1217.8 ; v1(2256.02,1316.22) U5.T26@2275.71,1296.54 ; v1(2256.02,1591.81) U5.T33@2275.71,1572.13 ; v1(2295.39,371.34) U5.U3@2315.08,391.02 ; v1(2295.39,410.71) U5.U4@2315.08,430.39 ; v1(2295.39,528.82) U5.U7@2315.08,548.5 ; v1(2295.39,568.19) U5.U8@2315.08,587.87 ; v1(2295.39,607.56) U5.U9@2315.08,627.24 ; v1(2295.39,646.93) U5.U10@2315.08,666.61 ; v1(2295.39,686.3) U5.U11@2315.08,705.98 ; v1(2295.39,765.04) U5.U13@2315.08,784.72 ; v1(2295.39,843.78) U5.U15@2315.08,863.46 ; v1(2295.39,922.52) U5.U17@2315.08,942.2 ; v1(2295.39,1001.26) U5.U19@2315.08,1020.94 ; v1(2295.39,1080) U5.U21@2315.08,1099.69 ; v1(2295.39,1198.11) U5.U23@2315.08,1178.43 ; v1(2295.39,1276.85) U5.U25@2315.08,1257.17 ; v1(2295.39,1355.59) U5.U27@2315.08,1335.91 ; v1(2295.39,1434.33) U5.U29@2315.08,1414.65 ; v1(2295.39,1473.7) U5.U30@2315.08,1454.02 ; v1(2295.39,1867.4) U5.U40@2315.08,1847.72 ; v1(2334.76,292.6) U5.V1@2354.45,312.28 ; v1(2334.76,331.97) U5.V2@2354.45,351.65 ; v1(2334.76,450.08) U5.V5@2354.45,469.76 ; v1(2334.76,489.45) U5.V6@2354.45,509.13 ; v1(2334.76,607.56) U5.V9@2354.45,627.24 ; v1(2334.76,646.93) U5.V10@2354.45,666.61 ; v1(2334.76,725.67) U5.V12@2354.45,745.35 ; v1(2334.76,804.41) U5.V14@2354.45,824.09 ; v1(2334.76,883.15) U5.V16@2354.45,902.83 ; v1(2334.76,961.89) U5.V18@2354.45,981.57 ; v1(2334.76,1040.63) U5.V20@2354.45,1060.32 ; v1(2334.76,1158.74) U5.V22@2354.45,1139.06 ; v1(2334.76,1237.48) U5.V24@2354.45,1217.8 ; v1(2334.76,1316.22) U5.V26@2354.45,1296.54 ; v1(2334.76,1394.96) U5.V28@2354.45,1375.28 ; v1(2334.76,1749.29) U5.V37@2354.45,1729.61 ; v1(2374.13,371.34) U5.W3@2393.82,391.02 ; v1(2374.13,528.82) U5.W7@2393.82,548.5 ; v1(2374.13,607.56) U5.W9@2393.82,627.24 ; v1(2374.13,686.3) U5.W11@2393.82,705.98 ; v1(2374.13,765.04) U5.W13@2393.82,784.72 ; v1(2374.13,843.78) U5.W15@2393.82,863.46 ; v1(2374.13,922.52) U5.W17@2393.82,942.2 ; v1(2374.13,1001.26) U5.W19@2393.82,1020.94 ; v1(2374.13,1080) U5.W21@2393.82,1099.69 ; v1(2374.13,1198.11) U5.W23@2393.82,1178.43 ; v1(2374.13,1276.85) U5.W25@2393.82,1257.17 ; v1(2374.13,1355.59) U5.W27@2393.82,1335.91 ; v1(2374.13,1631.18) U5.W34@2393.82,1611.5 ; v1(2413.5,292.6) U5.Y1@2433.19,312.28 ; v1(2413.5,331.97) U5.Y2@2433.19,351.65 ; v1(2413.5,450.08) U5.Y5@2433.19,469.76 ; v1(2413.5,489.45) U5.Y6@2433.19,509.13 ; v1(2413.5,607.56) U5.Y9@2433.19,627.24 ; v1(2413.5,646.93) U5.Y10@2433.19,666.61 ; v1(2413.5,725.67) U5.Y12@2433.19,745.35 ; v1(2413.5,804.41) U5.Y14@2433.19,824.09 ; v1(2413.5,883.15) U5.Y16@2433.19,902.83 ; v1(2413.5,961.89) U5.Y18@2433.19,981.57 ; v1(2413.5,1040.63) U5.Y20@2433.19,1060.32 ; v1(2413.5,1080) U5.Y21@2433.19,1099.69 ; v1(2413.5,1237.48) U5.Y24@2433.19,1217.8 ; v1(2413.5,1316.22) U5.Y26@2433.19,1296.54 ; v1(2413.5,1394.96) U5.Y28@2433.19,1375.28 ; v1(2413.5,1513.07) U5.Y31@2433.19,1493.39 ; v1(2413.5,1906.77) U5.Y41@2433.19,1887.09 ; v1(2452.87,371.34) U5.AA3@2472.56,391.02 ; v1(2452.87,528.82) U5.AA7@2472.56,548.5 ; v1(2452.87,607.56) U5.AA9@2472.56,627.24 ; v1(2452.87,686.3) U5.AA11@2472.56,705.98 ; v1(2452.87,765.04) U5.AA13@2472.56,784.72 ; v1(2452.87,843.78) U5.AA15@2472.56,863.46 ; v1(2452.87,922.52) U5.AA17@2472.56,942.2 ; v1(2452.87,1001.26) U5.AA19@2472.56,1020.94 ; v1(2452.87,1080) U5.AA21@2472.56,1099.69 ; v1(2452.87,1158.74) U5.AA22@2472.56,1139.06 ; v1(2452.87,1198.11) U5.AA23@2472.56,1178.43 ; v1(2452.87,1276.85) U5.AA25@2472.56,1257.17 ; v1(2452.87,1355.59) U5.AA27@2472.56,1335.91 ; v1(2452.87,1434.33) U5.AA29@2472.56,1414.65 ; v1(2452.87,1788.66) U5.AA38@2472.56,1768.98 ; U5.AB1@2511.93,312.28 v1(2531.62,292.6) ; U5.AB2@2511.93,351.65 v1(2531.62,331.97) ; U5.AB5@2511.93,469.76 v1(2531.62,450.08) ; U5.AB6@2511.93,509.13 v1(2531.62,489.45) ; U5.AB9@2511.93,627.24 v1(2531.62,607.56) ; U5.AB10@2511.93,666.61 v1(2531.62,646.93) ; U5.AB12@2511.93,745.35 v1(2531.62,725.67) ; U5.AB14@2511.93,824.09 v1(2531.62,804.41) ; U5.AB16@2511.93,902.83 v1(2531.62,883.15) ; U5.AB18@2511.93,981.57 v1(2531.62,961.89) ; U5.AB20@2511.93,1060.32 v1(2531.62,1040.63) ; U5.AB21@2511.93,1099.69 v1(2531.62,1080) ; U5.AB22@2511.93,1139.06 v1(2531.62,1158.74) ; U5.AB24@2511.93,1217.8 v1(2531.62,1237.48) ; U5.AB26@2511.93,1296.54 v1(2531.62,1316.22) ; U5.AB28@2511.93,1375.28 v1(2531.62,1394.96) ; U5.AB35@2511.93,1650.87 v1(2531.62,1670.55) ; U5.AC3@2551.3,391.02 v1(2570.99,371.34) ; U5.AC7@2551.3,548.5 v1(2570.99,528.82) ; U5.AC9@2551.3,627.24 v1(2570.99,607.56) ; U5.AC11@2551.3,705.98 v1(2570.99,686.3) ; U5.AC13@2551.3,784.72 v1(2570.99,765.04) ; U5.AC15@2551.3,863.46 v1(2570.99,843.78) ; U5.AC17@2551.3,942.2 v1(2570.99,922.52) ; U5.AC19@2551.3,1020.94 v1(2570.99,1001.26) ; U5.AC23@2551.3,1178.43 v1(2570.99,1198.11) ; U5.AC25@2551.3,1257.17 v1(2570.99,1276.85) ; U5.AC27@2551.3,1335.91 v1(2570.99,1355.59) ; U5.AC29@2551.3,1414.65 v1(2570.99,1434.33) ; U5.AC32@2551.3,1532.76 v1(2570.99,1552.44) ; U5.AC42@2551.3,1926.46 v1(2570.99,1946.14) ; U5.AD1@2590.67,312.28 v1(2610.36,292.6) ; U5.AD2@2590.67,351.65 v1(2610.36,331.97) ; U5.AD5@2590.67,469.76 v1(2610.36,450.08) ; U5.AD6@2590.67,509.13 v1(2610.36,489.45) ; U5.AD9@2590.67,627.24 v1(2610.36,607.56) ; U5.AD10@2590.67,666.61 v1(2610.36,646.93) ; U5.AD12@2590.67,745.35 v1(2610.36,725.67) ; U5.AD14@2590.67,824.09 v1(2610.36,804.41) ; U5.AD16@2590.67,902.83 v1(2610.36,883.15) ; U5.AD18@2590.67,981.57 v1(2610.36,961.89) ; U5.AD20@2590.67,1060.32 v1(2610.36,1040.63) ; U5.AD22@2590.67,1139.06 v1(2610.36,1158.74) ; U5.AD24@2590.67,1217.8 v1(2610.36,1237.48) ; U5.AD26@2590.67,1296.54 v1(2610.36,1316.22) ; U5.AD28@2590.67,1375.28 v1(2610.36,1394.96) ; U5.AD39@2590.67,1808.35 v1(2610.36,1828.03) ; U5.AE3@2630.04,391.02 v1(2649.73,371.34) ; U5.AE7@2630.04,548.5 v1(2649.73,528.82) ; U5.AE9@2630.04,627.24 v1(2649.73,607.56) ; U5.AE11@2630.04,705.98 v1(2649.73,686.3) ; U5.AE13@2630.04,784.72 v1(2649.73,765.04) ; U5.AE15@2630.04,863.46 v1(2649.73,843.78) ; U5.AE17@2630.04,942.2 v1(2649.73,922.52) ; U5.AE19@2630.04,1020.94 v1(2649.73,1001.26) ; U5.AE21@2630.04,1099.69 v1(2649.73,1080) ; U5.AE23@2630.04,1178.43 v1(2649.73,1198.11) ; U5.AE25@2630.04,1257.17 v1(2649.73,1276.85) ; U5.AE27@2630.04,1335.91 v1(2649.73,1355.59) ; U5.AE29@2630.04,1414.65 v1(2649.73,1434.33) ; U5.AE36@2630.04,1690.24 v1(2649.73,1709.92) ; U5.AF1@2669.41,312.28 v1(2689.1,292.6) ; U5.AF2@2669.41,351.65 v1(2689.1,331.97) ; U5.AF5@2669.41,469.76 v1(2689.1,450.08) ; U5.AF6@2669.41,509.13 v1(2689.1,489.45) ; U5.AF9@2669.41,627.24 v1(2689.1,607.56) ; U5.AF10@2669.41,666.61 v1(2689.1,646.93) ; U5.AF11@2669.41,705.98 v1(2689.1,686.3) ; U5.AF12@2669.41,745.35 v1(2689.1,725.67) ; U5.AF14@2669.41,824.09 v1(2689.1,804.41) ; U5.AF16@2669.41,902.83 v1(2689.1,883.15) ; U5.AF18@2669.41,981.57 v1(2689.1,961.89) ; U5.AF20@2669.41,1060.32 v1(2689.1,1040.63) ; U5.AF22@2669.41,1139.06 v1(2689.1,1158.74) ; U5.AF24@2669.41,1217.8 v1(2689.1,1237.48) ; U5.AF26@2669.41,1296.54 v1(2689.1,1316.22) ; U5.AF28@2669.41,1375.28 v1(2689.1,1394.96) ; U5.AF33@2669.41,1572.13 v1(2689.1,1591.81) ; U5.AG3@2708.78,391.02 v1(2728.47,371.34) ; U5.AG4@2708.78,430.39 v1(2728.47,410.71) ; U5.AG7@2708.78,548.5 v1(2728.47,528.82) ; U5.AG8@2708.78,587.87 v1(2728.47,568.19) ; U5.AG9@2708.78,627.24 v1(2728.47,607.56) ; U5.AG10@2708.78,666.61 v1(2728.47,646.93) ; U5.AG11@2708.78,705.98 v1(2728.47,686.3) ; U5.AG13@2708.78,784.72 v1(2728.47,765.04) ; U5.AG15@2708.78,863.46 v1(2728.47,843.78) ; U5.AG17@2708.78,942.2 v1(2728.47,922.52) ; U5.AG19@2708.78,1020.94 v1(2728.47,1001.26) ; U5.AG21@2708.78,1099.69 v1(2728.47,1080) ; U5.AG23@2708.78,1178.43 v1(2728.47,1198.11) ; U5.AG30@2708.78,1454.02 v1(2728.47,1473.7) ; U5.AG40@2708.78,1847.72 v1(2728.47,1867.4) ; U5.AH1@2748.15,312.28 v1(2767.84,292.6) ; U5.AH2@2748.15,351.65 v1(2767.84,331.97) ; U5.AH5@2748.15,469.76 v1(2767.84,450.08) ; U5.AH6@2748.15,509.13 v1(2767.84,489.45) ; U5.AH9@2748.15,627.24 v1(2767.84,607.56) ; U5.AH11@2748.15,705.98 v1(2767.84,686.3) ; U5.AH12@2748.15,745.35 v1(2767.84,725.67) ; U5.AH14@2748.15,824.09 v1(2767.84,804.41) ; U5.AH16@2748.15,902.83 v1(2767.84,883.15) ; U5.AH17@2748.15,942.2 v1(2767.84,922.52) ; U5.AH18@2748.15,981.57 v1(2767.84,961.89) ; U5.AH20@2748.15,1060.32 v1(2767.84,1040.63) ; U5.AH27@2748.15,1335.91 v1(2767.84,1355.59) ; U5.AH37@2748.15,1729.61 v1(2767.84,1749.29) ; U5.AJ3@2787.52,391.02 v1(2807.21,371.34) ; U5.AJ7@2787.52,548.5 v1(2807.21,528.82) ; U5.AJ9@2787.52,627.24 v1(2807.21,607.56) ; U5.AJ10@2787.52,666.61 v1(2807.21,646.93) ; U5.AJ11@2787.52,705.98 v1(2807.21,686.3) ; U5.AJ12@2787.52,745.35 v1(2807.21,725.67) ; U5.AJ13@2787.52,784.72 v1(2807.21,765.04) ; U5.AJ14@2787.52,824.09 v1(2807.21,804.41) ; U5.AJ24@2787.52,1217.8 v1(2807.21,1237.48) ; U5.AJ34@2787.52,1611.5 v1(2807.21,1631.18) ; U5.AK1@2826.89,312.28 v1(2846.58,292.6) ; U5.AK2@2826.89,351.65 v1(2846.58,331.97) ; U5.AK5@2826.89,469.76 v1(2846.58,450.08) ; U5.AK6@2826.89,509.13 v1(2846.58,489.45) ; U5.AK9@2826.89,627.24 v1(2846.58,607.56) ; U5.AK11@2826.89,705.98 v1(2846.58,686.3) ; U5.AK12@2826.89,745.35 v1(2846.58,725.67) ; U5.AK13@2826.89,784.72 v1(2846.58,765.04) ; U5.AK21@2826.89,1099.69 v1(2846.58,1080) ; U5.AK31@2826.89,1493.39 v1(2846.58,1513.07) ; U5.AK41@2826.89,1887.09 v1(2846.58,1906.77) ; U5.AL3@2866.26,391.02 v1(2885.95,371.34) ; U5.AL7@2866.26,548.5 v1(2885.95,528.82) ; U5.AL9@2866.26,627.24 v1(2885.95,607.56) ; U5.AL12@2866.26,745.35 v1(2885.95,725.67) ; U5.AL18@2866.26,981.57 v1(2885.95,961.89) ; U5.AL28@2866.26,1375.28 v1(2885.95,1394.96) ; U5.AL38@2866.26,1768.98 v1(2885.95,1788.66) ; U5.AM1@2905.63,312.28 v1(2925.32,292.6) ; U5.AM2@2905.63,351.65 v1(2925.32,331.97) ; U5.AM5@2905.63,469.76 v1(2925.32,450.08) ; U5.AM9@2905.63,627.24 v1(2925.32,607.56) ; U5.AM10@2905.63,666.61 v1(2925.32,646.93) ; U5.AM15@2905.63,863.46 v1(2925.32,843.78) ; U5.AM25@2905.63,1257.17 v1(2925.32,1276.85) ; U5.AM35@2905.63,1650.87 v1(2925.32,1670.55) ; U5.AN3@2945,391.02 v1(2964.69,371.34) ; U5.AN7@2945,548.5 v1(2964.69,528.82) ; U5.AN9@2945,627.24 v1(2964.69,607.56) ; U5.AN12@2945,745.35 v1(2964.69,725.67) ; U5.AN22@2945,1139.06 v1(2964.69,1158.74) ; U5.AN32@2945,1532.76 v1(2964.69,1552.44) ; U5.AN42@2945,1926.46 v1(2964.69,1946.14) ; U5.AP1@2984.37,312.28 v1(3004.06,292.6) ; U5.AP2@2984.37,351.65 v1(3004.06,331.97) ; U5.AP5@2984.37,469.76 v1(3004.06,450.08) ; U5.AP9@2984.37,627.24 v1(3004.06,607.56) ; U5.AP19@2984.37,1020.94 v1(3004.06,1001.26) ; U5.AP29@2984.37,1414.65 v1(3004.06,1434.33) ; U5.AP39@2984.37,1808.35 v1(3004.06,1828.03) ; U5.AR3@3023.74,391.02 v1(3043.43,371.34) ; U5.AR7@3023.74,548.5 v1(3043.43,528.82) ; U5.AR9@3023.74,627.24 v1(3043.43,607.56) ; U5.AR16@3023.74,902.83 v1(3043.43,883.15) ; U5.AR26@3023.74,1296.54 v1(3043.43,1316.22) ; U5.AR36@3023.74,1690.24 v1(3043.43,1709.92) ; U5.AT1@3063.11,312.28 v1(3082.8,292.6) ; U5.AT2@3063.11,351.65 v1(3082.8,331.97) ; U5.AT5@3063.11,469.76 v1(3082.8,450.08) ; U5.AT6@3063.11,509.13 v1(3082.8,489.45) ; U5.AT9@3063.11,627.24 v1(3082.8,607.56) ; U5.AT10@3063.11,666.61 v1(3082.8,646.93) ; U5.AT11@3063.11,705.98 v1(3082.8,686.3) ; U5.AT13@3063.11,784.72 v1(3082.8,765.04) ; U5.AT23@3063.11,1178.43 v1(3082.8,1198.11) ; U5.AT33@3063.11,1572.13 v1(3082.8,1591.81) ; U5.AU3@3102.48,391.02 v1(3122.17,371.34) ; U5.AU7@3102.48,548.5 v1(3122.17,528.82) ; U5.AU11@3102.48,705.98 v1(3122.17,686.3) ; U5.AU20@3102.48,1060.32 v1(3122.17,1040.63) ; U5.AU30@3102.48,1454.02 v1(3122.17,1473.7) ; U5.AU40@3102.48,1847.72 v1(3122.17,1867.4) ; U5.AV1@3141.85,312.28 v1(3161.54,292.6) ; U5.AV2@3141.85,351.65 v1(3161.54,331.97) ; U5.AV5@3141.85,469.76 v1(3161.54,450.08) ; U5.AV9@3141.85,627.24 v1(3161.54,607.56) ; U5.AV10@3141.85,666.61 v1(3161.54,646.93) ; U5.AV11@3141.85,705.98 v1(3161.54,686.3) ; U5.AV17@3141.85,942.2 v1(3161.54,922.52) ; U5.AV27@3141.85,1335.91 v1(3161.54,1355.59) ; U5.AV37@3141.85,1729.61 v1(3161.54,1749.29) ; U5.AW3@3181.22,391.02 v1(3200.91,371.34) ; U5.AW7@3181.22,548.5 v1(3200.91,528.82) ; U5.AW11@3181.22,705.98 v1(3200.91,686.3) ; U5.AW14@3181.22,824.09 v1(3200.91,804.41) ; U5.AW24@3181.22,1217.8 v1(3200.91,1237.48) ; U5.AW34@3181.22,1611.5 v1(3200.91,1631.18) ; U5.AY1@3220.59,312.28 v1(3240.28,292.6) ; U5.AY2@3220.59,351.65 v1(3240.28,331.97) ; U5.AY5@3220.59,469.76 v1(3240.28,450.08) ; U5.AY9@3220.59,627.24 v1(3240.28,607.56) ; U5.AY10@3220.59,666.61 v1(3240.28,646.93) ; U5.AY11@3220.59,705.98 v1(3240.28,686.3) ; U5.AY12@3220.59,745.35 v1(3240.28,725.67) ; U5.AY21@3220.59,1099.69 v1(3240.28,1080) ; U5.AY31@3220.59,1493.39 v1(3240.28,1513.07) ; U5.AY41@3220.59,1887.09 v1(3240.28,1906.77) ; U5.BA3@3259.96,391.02 v1(3279.65,371.34) ; U5.BA7@3259.96,548.5 v1(3279.65,528.82) ; U5.BA11@3259.96,705.98 v1(3279.65,686.3) ; U5.BA12@3259.96,745.35 v1(3279.65,725.67) ; U5.BA18@3259.96,981.57 v1(3279.65,961.89) ; U5.BA28@3259.96,1375.28 v1(3279.65,1394.96) ; U5.BA38@3259.96,1768.98 v1(3279.65,1788.66) ; U5.BB2@3299.33,351.65 v1(3319.02,331.97) ; U5.BB5@3299.33,469.76 v1(3319.02,450.08) ; U5.BB6@3299.33,509.13 v1(3319.02,489.45) ; U5.BB9@3299.33,627.24 v1(3319.02,607.56) ; U5.BB10@3299.33,666.61 v1(3319.02,646.93) ; U5.BB11@3299.33,705.98 v1(3319.02,686.3) ; U5.BB12@3299.33,745.35 v1(3319.02,725.67) ; U5.BB15@3299.33,863.46 v1(3319.02,843.78) ; U5.BB25@3299.33,1257.17 v1(3319.02,1276.85) ; U5.BB35@3299.33,1650.87 v1(3319.02,1670.55)
HSWAPEN: U5.P10 | length 27.8
  L1 TOP w5: v1(2177.28,646.93) U5.P10@2196.97,666.61
JTAG_GRAB: 
MGT0_REFCLK_N: 
MGT0_REFCLK_P: 
MGT1_REFCLK_N: 
MGT1_REFCLK_P: 
MGT_1V0: U5.AA8 U5.AC8 U5.AE8 U5.AJ8 U5.AL8 U5.AN8 U5.AR8 U5.AU8 U5.AW8 U5.BA8 U5.C8 U5.E8 U5.G8 U5.J8 U5.L8 U5.N8 U5.R8 U5.W8 | length 501.1
  L1 TOP w5: v1(1744.21,568.19) U5.C8@1763.9,587.87 ; v1(1822.95,568.19) U5.E8@1842.64,587.87 ; v1(1901.69,568.19) U5.G8@1921.38,587.87 ; v1(1980.43,568.19) U5.J8@2000.12,587.87 ; v1(2059.17,568.19) U5.L8@2078.86,587.87 ; v1(2137.91,568.19) U5.N8@2157.6,587.87 ; v1(2216.65,568.19) U5.R8@2236.34,587.87 ; v1(2374.13,568.19) U5.W8@2393.82,587.87 ; v1(2452.87,568.19) U5.AA8@2472.56,587.87 ; U5.AC8@2551.3,587.87 v1(2570.99,568.19) ; U5.AE8@2630.04,587.87 v1(2649.73,568.19) ; U5.AJ8@2787.52,587.87 v1(2807.21,568.19) ; U5.AL8@2866.26,587.87 v1(2885.95,568.19) ; U5.AN8@2945,587.87 v1(2964.69,568.19) ; U5.AR8@3023.74,587.87 v1(3043.43,568.19) ; U5.AU8@3102.48,587.87 v1(3122.17,568.19) ; U5.AW8@3181.22,587.87 v1(3200.91,568.19) ; U5.BA8@3259.96,587.87 v1(3279.65,568.19)
MGT_1V0_PG: 
MGT_1V2: U5.A12 U5.AA4 U5.AC4 U5.AE4 U5.AJ4 U5.AL4 U5.AM6 U5.AN4 U5.AP6 U5.AR4 U5.AU4 U5.AV6 U5.AW4 U5.AY6 U5.B6 U5.BA4 U5.C4 U5.D6 U5.E4 U5.F6 U5.G4 U5.H6 U5.J4 U5.L4 U5.N4 U5.P6 U5.R4 U5.W4 | length 779.5
  L1 TOP w5: v1(1665.47,725.67) U5.A12@1685.16,745.35 ; v1(1704.84,489.45) U5.B6@1724.53,509.13 ; v1(1744.21,410.71) U5.C4@1763.9,430.39 ; v1(1783.58,489.45) U5.D6@1803.27,509.13 ; v1(1822.95,410.71) U5.E4@1842.64,430.39 ; v1(1862.32,489.45) U5.F6@1882.01,509.13 ; v1(1901.69,410.71) U5.G4@1921.38,430.39 ; v1(1941.06,489.45) U5.H6@1960.75,509.13 ; v1(1980.43,410.71) U5.J4@2000.12,430.39 ; v1(2059.17,410.71) U5.L4@2078.86,430.39 ; v1(2137.91,410.71) U5.N4@2157.6,430.39 ; v1(2177.28,489.45) U5.P6@2196.97,509.13 ; v1(2216.65,410.71) U5.R4@2236.34,430.39 ; v1(2374.13,410.71) U5.W4@2393.82,430.39 ; v1(2452.87,410.71) U5.AA4@2472.56,430.39 ; U5.AC4@2551.3,430.39 v1(2570.99,410.71) ; U5.AE4@2630.04,430.39 v1(2649.73,410.71) ; U5.AJ4@2787.52,430.39 v1(2807.21,410.71) ; U5.AL4@2866.26,430.39 v1(2885.95,410.71) ; U5.AM6@2905.63,509.13 v1(2925.32,489.45) ; U5.AN4@2945,430.39 v1(2964.69,410.71) ; U5.AP6@2984.37,509.13 v1(3004.06,489.45) ; U5.AR4@3023.74,430.39 v1(3043.43,410.71) ; U5.AU4@3102.48,430.39 v1(3122.17,410.71) ; U5.AV6@3141.85,509.13 v1(3161.54,489.45) ; U5.AW4@3181.22,430.39 v1(3200.91,410.71) ; U5.AY6@3220.59,509.13 v1(3240.28,489.45) ; U5.BA4@3259.96,430.39 v1(3279.65,410.71)
MGT_1V2_PG: 
MGT_GPIO0: U5.J16 | length 27.8
  L1 TOP w5: v1(1980.43,883.15) U5.J16@2000.12,902.83
MGT_GPIO1: U5.H20 | length 27.8
  L1 TOP w5: v1(1941.06,1040.63) U5.H20@1960.75,1060.32
MGT_GPIO2: U5.N18 | length 27.8
  L1 TOP w5: v1(2137.91,961.89) U5.N18@2157.6,981.57
MGT_GPIO3: U5.B16 | length 27.8
  L1 TOP w5: v1(1704.84,883.15) U5.B16@1724.53,902.83
MGT_GPIO4: U5.L29 | length 27.8
  L1 TOP w5: v1(2059.17,1434.33) U5.L29@2078.86,1414.65
MGT_GPIO5: U5.K29 | length 27.8
  L1 TOP w5: v1(2019.8,1434.33) U5.K29@2039.49,1414.65
MGT_GPIO6: U5.N15 | length 27.8
  L1 TOP w5: v1(2137.91,843.78) U5.N15@2157.6,863.46
MGT_GPIO7: U5.P16 | length 27.8
  L1 TOP w5: v1(2177.28,883.15) U5.P16@2196.97,902.83
MGT_GPIO8: U5.N16 | length 27.8
  L1 TOP w5: v1(2137.91,883.15) U5.N16@2157.6,902.83
MGT_GPIO9: U5.P17 | length 27.8
  L1 TOP w5: v1(2177.28,922.52) U5.P17@2196.97,942.2
MGT_GPIO10: U5.L15 | length 27.8
  L1 TOP w5: v1(2059.17,843.78) U5.L15@2078.86,863.46
MGT_GPIO11: U5.K19 | length 27.8
  L1 TOP w5: v1(2019.8,1001.26) U5.K19@2039.49,1020.94
MGT_RX_AC0_N: U5.AW6 | length 27.8
  L1 TOP w3.8: U5.AW6@3181.22,509.13 v1(3200.91,489.45)
MGT_RX_AC0_P: U5.AW5 | length 27.8
  L1 TOP w3.8: U5.AW5@3181.22,469.76 v1(3200.91,450.08)
MGT_RX_AC1_N: U5.AY8 | length 27.8
  L1 TOP w3.8: U5.AY8@3220.59,587.87 v1(3240.28,568.19)
MGT_RX_AC1_P: U5.AY7 | length 27.8
  L1 TOP w3.8: U5.AY7@3220.59,548.5 v1(3240.28,528.82)
MGT_RX_AC2_N: U5.BA6 | length 27.8
  L1 TOP w3.8: U5.BA6@3259.96,509.13 v1(3279.65,489.45)
MGT_RX_AC2_P: U5.BA5 | length 27.8
  L1 TOP w3.8: U5.BA5@3259.96,469.76 v1(3279.65,450.08)
MGT_RX_AC3_N: U5.BB8 | length 27.8
  L1 TOP w3.8: U5.BB8@3299.33,587.87 v1(3319.02,568.19)
MGT_RX_AC3_P: U5.BB7 | length 27.8
  L1 TOP w3.8: U5.BB7@3299.33,548.5 v1(3319.02,528.82)
MGT_RX_AC4_N: U5.AP8 | length 27.8
  L1 TOP w3.8: U5.AP8@2984.37,587.87 v1(3004.06,568.19)
MGT_RX_AC4_P: U5.AP7 | length 27.8
  L1 TOP w3.8: U5.AP7@2984.37,548.5 v1(3004.06,528.82)
MGT_RX_AC5_N: U5.AR6 | length 27.8
  L1 TOP w3.8: U5.AR6@3023.74,509.13 v1(3043.43,489.45)
MGT_RX_AC5_P: U5.AR5 | length 27.8
  L1 TOP w3.8: U5.AR5@3023.74,469.76 v1(3043.43,450.08)
MGT_RX_AC6_N: U5.AU6 | length 27.8
  L1 TOP w3.8: U5.AU6@3102.48,509.13 v1(3122.17,489.45)
MGT_RX_AC6_P: U5.AU5 | length 27.8
  L1 TOP w3.8: U5.AU5@3102.48,469.76 v1(3122.17,450.08)
MGT_RX_AC7_N: U5.AV8 | length 27.8
  L1 TOP w3.8: U5.AV8@3141.85,587.87 v1(3161.54,568.19)
MGT_RX_AC7_P: U5.AV7 | length 27.8
  L1 TOP w3.8: U5.AV7@3141.85,548.5 v1(3161.54,528.82)
MGT_RX_AC8_N: U5.AJ6 | length 27.8
  L1 TOP w3.8: U5.AJ6@2787.52,509.13 v1(2807.21,489.45)
MGT_RX_AC8_P: U5.AJ5 | length 27.8
  L1 TOP w3.8: U5.AJ5@2787.52,469.76 v1(2807.21,450.08)
MGT_RX_AC9_N: U5.AL6 | length 27.8
  L1 TOP w3.8: U5.AL6@2866.26,509.13 v1(2885.95,489.45)
MGT_RX_AC9_P: U5.AL5 | length 27.8
  L1 TOP w3.8: U5.AL5@2866.26,469.76 v1(2885.95,450.08)
MGT_RX_AC10_N: U5.AM8 | length 27.8
  L1 TOP w3.8: U5.AM8@2905.63,587.87 v1(2925.32,568.19)
MGT_RX_AC10_P: U5.AM7 | length 27.8
  L1 TOP w3.8: U5.AM7@2905.63,548.5 v1(2925.32,528.82)
MGT_RX_AC11_N: U5.AN6 | length 27.8
  L1 TOP w3.8: U5.AN6@2945,509.13 v1(2964.69,489.45)
MGT_RX_AC11_P: U5.AN5 | length 27.8
  L1 TOP w3.8: U5.AN5@2945,469.76 v1(2964.69,450.08)
MGT_RX_AC12_N: U5.AD4 | length 27.8
  L1 TOP w3.8: U5.AD4@2590.67,430.39 v1(2610.36,410.71)
MGT_RX_AC12_P: U5.AD3 | length 27.8
  L1 TOP w3.8: U5.AD3@2590.67,391.02 v1(2610.36,371.34)
MGT_RX_AC13_N: U5.AE6 | length 27.8
  L1 TOP w3.8: U5.AE6@2630.04,509.13 v1(2649.73,489.45)
MGT_RX_AC13_P: U5.AE5 | length 27.8
  L1 TOP w3.8: U5.AE5@2630.04,469.76 v1(2649.73,450.08)
MGT_RX_AC14_N: U5.AF4 | length 27.8
  L1 TOP w3.8: U5.AF4@2669.41,430.39 v1(2689.1,410.71)
MGT_RX_AC14_P: U5.AF3 | length 27.8
  L1 TOP w3.8: U5.AF3@2669.41,391.02 v1(2689.1,371.34)
MGT_RX_AC15_N: U5.AG6 | length 27.8
  L1 TOP w3.8: U5.AG6@2708.78,509.13 v1(2728.47,489.45)
MGT_RX_AC15_P: U5.AG5 | length 27.8
  L1 TOP w3.8: U5.AG5@2708.78,469.76 v1(2728.47,450.08)
MGT_RX_AC16_N: U5.Y4 | length 27.8
  L1 TOP w3.8: v1(2413.5,410.71) U5.Y4@2433.19,430.39
MGT_RX_AC16_P: U5.Y3 | length 27.8
  L1 TOP w3.8: v1(2413.5,371.34) U5.Y3@2433.19,391.02
MGT_RX_AC17_N: U5.AA6 | length 27.8
  L1 TOP w3.8: v1(2452.87,489.45) U5.AA6@2472.56,509.13
MGT_RX_AC17_P: U5.AA5 | length 27.8
  L1 TOP w3.8: v1(2452.87,450.08) U5.AA5@2472.56,469.76
MGT_RX_AC18_N: U5.AB4 | length 27.8
  L1 TOP w3.8: U5.AB4@2511.93,430.39 v1(2531.62,410.71)
MGT_RX_AC18_P: U5.AB3 | length 27.8
  L1 TOP w3.8: U5.AB3@2511.93,391.02 v1(2531.62,371.34)
MGT_RX_AC19_N: U5.AC6 | length 27.8
  L1 TOP w3.8: U5.AC6@2551.3,509.13 v1(2570.99,489.45)
MGT_RX_AC19_P: U5.AC5 | length 27.8
  L1 TOP w3.8: U5.AC5@2551.3,469.76 v1(2570.99,450.08)
MGT_RX_AC20_N: U5.R6 | length 27.8
  L1 TOP w3.8: v1(2216.65,489.45) U5.R6@2236.34,509.13
MGT_RX_AC20_P: U5.R5 | length 27.8
  L1 TOP w3.8: v1(2216.65,450.08) U5.R5@2236.34,469.76
MGT_RX_AC21_N: U5.U6 | length 27.8
  L1 TOP w3.8: v1(2295.39,489.45) U5.U6@2315.08,509.13
MGT_RX_AC21_P: U5.U5 | length 27.8
  L1 TOP w3.8: v1(2295.39,450.08) U5.U5@2315.08,469.76
MGT_RX_AC22_N: U5.V4 | length 27.8
  L1 TOP w3.8: v1(2334.76,410.71) U5.V4@2354.45,430.39
MGT_RX_AC22_P: U5.V3 | length 27.8
  L1 TOP w3.8: v1(2334.76,371.34) U5.V3@2354.45,391.02
MGT_RX_AC23_N: U5.W6 | length 27.8
  L1 TOP w3.8: v1(2374.13,489.45) U5.W6@2393.82,509.13
MGT_RX_AC23_P: U5.W5 | length 27.8
  L1 TOP w3.8: v1(2374.13,450.08) U5.W5@2393.82,469.76
MGT_RX_AC24_N: U5.J6 | length 27.8
  L1 TOP w3.8: v1(1980.43,489.45) U5.J6@2000.12,509.13
MGT_RX_AC24_P: U5.J5 | length 27.8
  L1 TOP w3.8: v1(1980.43,450.08) U5.J5@2000.12,469.76
MGT_RX_AC25_N: U5.L6 | length 27.8
  L1 TOP w3.8: v1(2059.17,489.45) U5.L6@2078.86,509.13
MGT_RX_AC25_P: U5.L5 | length 27.8
  L1 TOP w3.8: v1(2059.17,450.08) U5.L5@2078.86,469.76
MGT_RX_AC26_N: U5.N6 | length 27.8
  L1 TOP w3.8: v1(2137.91,489.45) U5.N6@2157.6,509.13
MGT_RX_AC26_P: U5.N5 | length 27.8
  L1 TOP w3.8: v1(2137.91,450.08) U5.N5@2157.6,469.76
MGT_RX_AC27_N: U5.P8 | length 27.8
  L1 TOP w3.8: v1(2177.28,568.19) U5.P8@2196.97,587.87
MGT_RX_AC27_P: U5.P7 | length 27.8
  L1 TOP w3.8: v1(2177.28,528.82) U5.P7@2196.97,548.5
MGT_RX_AC28_N: U5.E6 | length 27.8
  L1 TOP w3.8: v1(1822.95,489.45) U5.E6@1842.64,509.13
MGT_RX_AC28_P: U5.E5 | length 27.8
  L1 TOP w3.8: v1(1822.95,450.08) U5.E5@1842.64,469.76
MGT_RX_AC29_N: U5.F8 | length 27.8
  L1 TOP w3.8: v1(1862.32,568.19) U5.F8@1882.01,587.87
MGT_RX_AC29_P: U5.F7 | length 27.8
  L1 TOP w3.8: v1(1862.32,528.82) U5.F7@1882.01,548.5
MGT_RX_AC30_N: U5.G6 | length 27.8
  L1 TOP w3.8: v1(1901.69,489.45) U5.G6@1921.38,509.13
MGT_RX_AC30_P: U5.G5 | length 27.8
  L1 TOP w3.8: v1(1901.69,450.08) U5.G5@1921.38,469.76
MGT_RX_AC31_N: U5.H8 | length 27.8
  L1 TOP w3.8: v1(1941.06,568.19) U5.H8@1960.75,587.87
MGT_RX_AC31_P: U5.H7 | length 27.8
  L1 TOP w3.8: v1(1941.06,528.82) U5.H7@1960.75,548.5
MGT_RX_N0: 
MGT_RX_N1: 
MGT_RX_N2: 
MGT_RX_N3: 
MGT_RX_N4: 
MGT_RX_N5: 
MGT_RX_N6: 
MGT_RX_N7: 
MGT_RX_N8: 
MGT_RX_N9: 
MGT_RX_N10: 
MGT_RX_N11: 
MGT_RX_N12: 
MGT_RX_N13: 
MGT_RX_N14: 
MGT_RX_N15: 
MGT_RX_N16: 
MGT_RX_N17: 
MGT_RX_N18: 
MGT_RX_N19: 
MGT_RX_N20: 
MGT_RX_N21: 
MGT_RX_N22: 
MGT_RX_N23: 
MGT_RX_N24: 
MGT_RX_N25: 
MGT_RX_N26: 
MGT_RX_N27: 
MGT_RX_N28: 
MGT_RX_N29: 
MGT_RX_N30: 
MGT_RX_N31: 
MGT_RX_P0: 
MGT_RX_P1: 
MGT_RX_P2: 
MGT_RX_P3: 
MGT_RX_P4: 
MGT_RX_P5: 
MGT_RX_P6: 
MGT_RX_P7: 
MGT_RX_P8: 
MGT_RX_P9: 
MGT_RX_P10: 
MGT_RX_P11: 
MGT_RX_P12: 
MGT_RX_P13: 
MGT_RX_P14: 
MGT_RX_P15: 
MGT_RX_P16: 
MGT_RX_P17: 
MGT_RX_P18: 
MGT_RX_P19: 
MGT_RX_P20: 
MGT_RX_P21: 
MGT_RX_P22: 
MGT_RX_P23: 
MGT_RX_P24: 
MGT_RX_P25: 
MGT_RX_P26: 
MGT_RX_P27: 
MGT_RX_P28: 
MGT_RX_P29: 
MGT_RX_P30: 
MGT_RX_P31: 
MGT_TX_N0: U5.AW2 | length 27.8
  L1 TOP w3.8: U5.AW2@3181.22,351.65 v1(3200.91,331.97)
MGT_TX_N1: U5.AY4 | length 27.8
  L1 TOP w3.8: U5.AY4@3220.59,430.39 v1(3240.28,410.71)
MGT_TX_N2: U5.BA2 | length 27.8
  L1 TOP w3.8: U5.BA2@3259.96,351.65 v1(3279.65,331.97)
MGT_TX_N3: U5.BB4 | length 27.8
  L1 TOP w3.8: U5.BB4@3299.33,430.39 v1(3319.02,410.71)
MGT_TX_N4: U5.AR2 | length 27.8
  L1 TOP w3.8: U5.AR2@3023.74,351.65 v1(3043.43,331.97)
MGT_TX_N5: U5.AT4 | length 27.8
  L1 TOP w3.8: U5.AT4@3063.11,430.39 v1(3082.8,410.71)
MGT_TX_N6: U5.AU2 | length 27.8
  L1 TOP w3.8: U5.AU2@3102.48,351.65 v1(3122.17,331.97)
MGT_TX_N7: U5.AV4 | length 27.8
  L1 TOP w3.8: U5.AV4@3141.85,430.39 v1(3161.54,410.71)
MGT_TX_N8: U5.AL2 | length 27.8
  L1 TOP w3.8: U5.AL2@2866.26,351.65 v1(2885.95,331.97)
MGT_TX_N9: U5.AM4 | length 27.8
  L1 TOP w3.8: U5.AM4@2905.63,430.39 v1(2925.32,410.71)